# EAGLE board 8or4 spaced (EAGLE 6.4), part 1 of 2
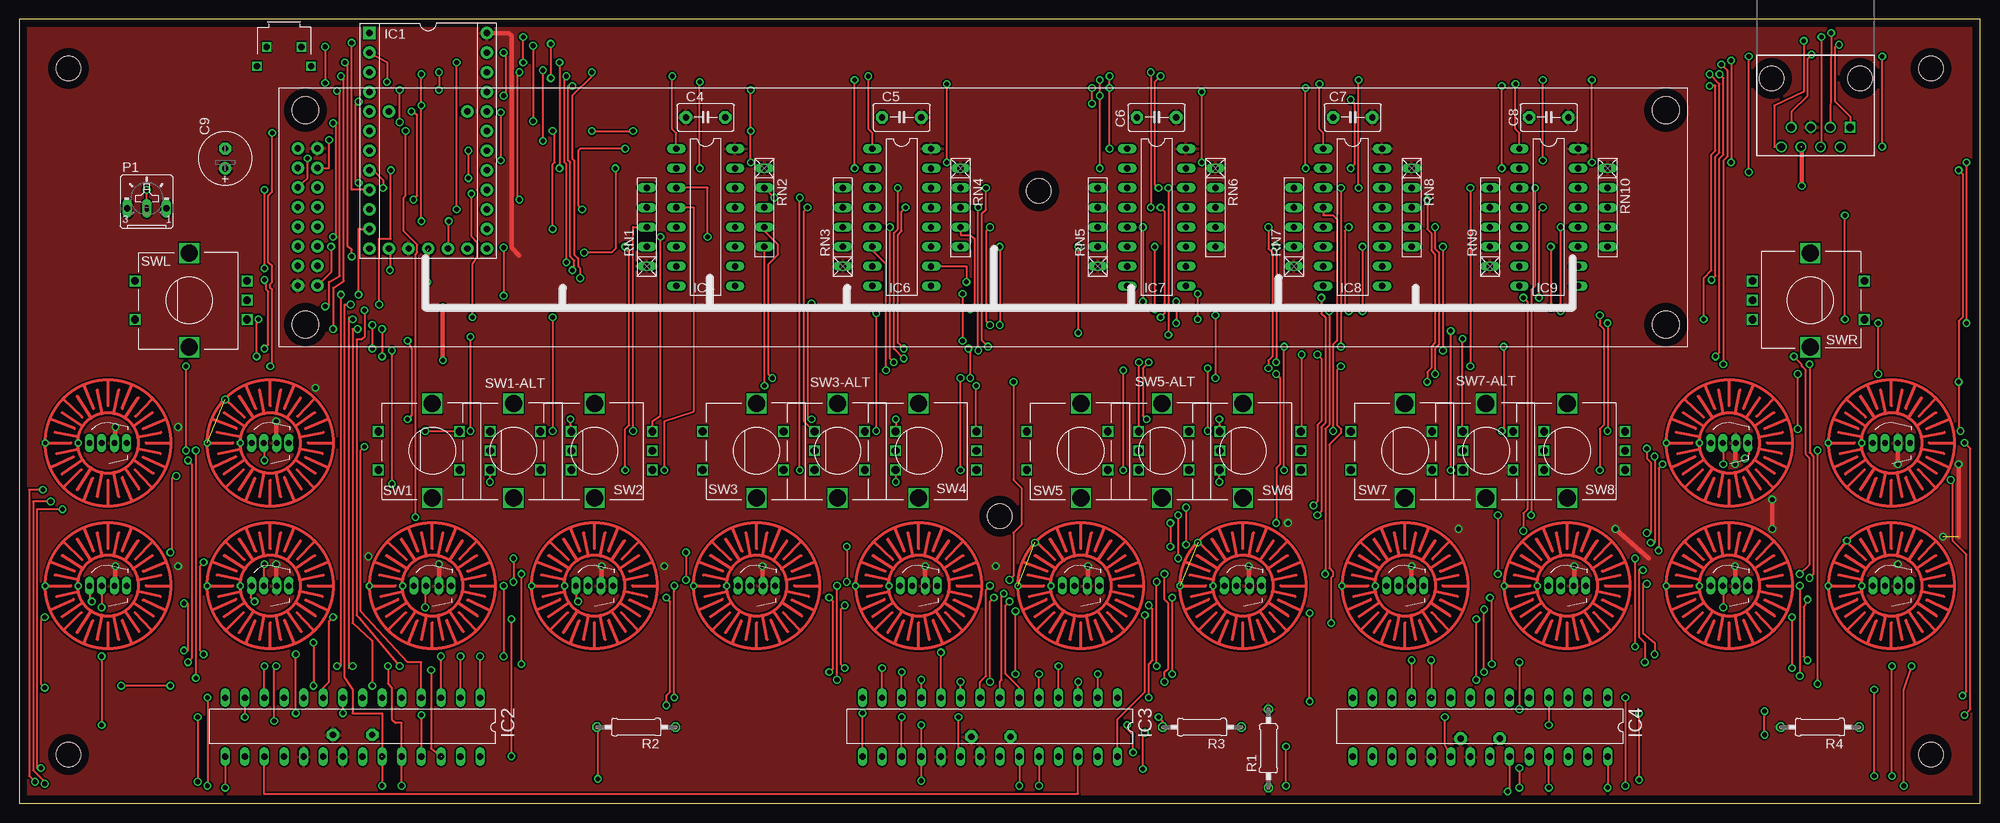
[diagram p0: board, top side]
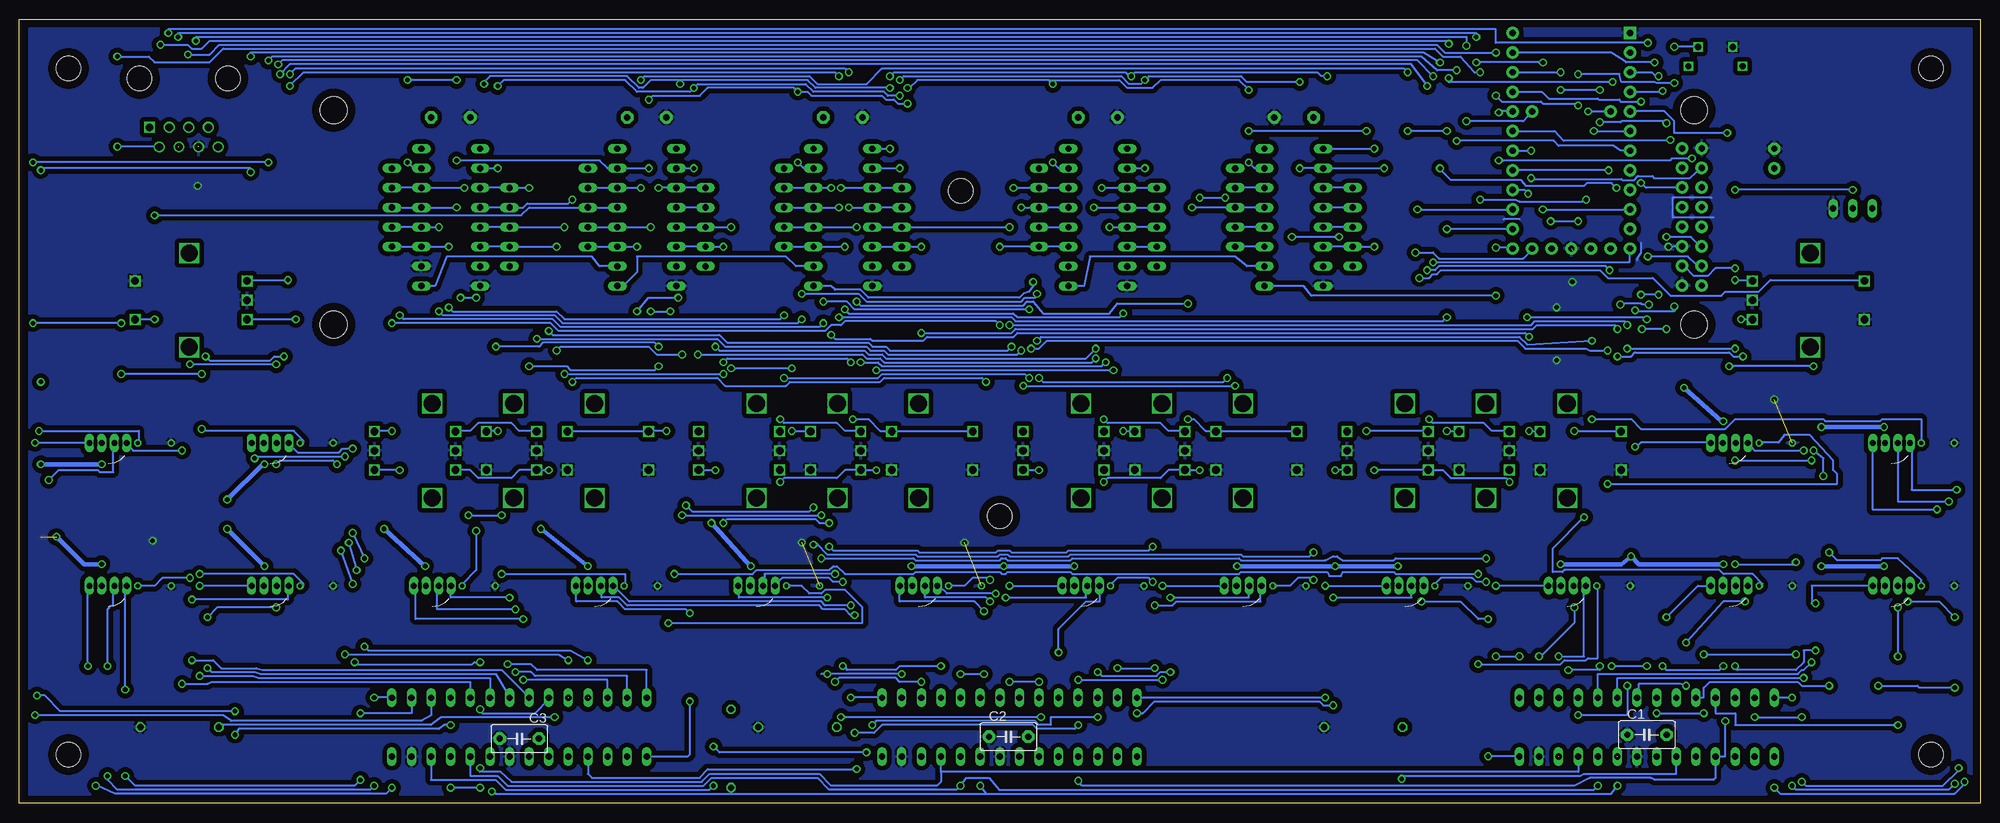
[diagram p1: board, bottom side, seen from below]

Size 254 x 101.6 mm. Coordinates in mm from the lower left corner, seen from the top.
Outline: 0,0 254,0 254,101.6 0,101.6 0,0
Copper layers (1*16): Top 0.035mm / dielectric 1.5mm / Bottom 0.035mm
Design rules "default *": minimum track width 10mil, minimum drill 8mil, track to track 8mil, track to pad 8mil, pad to pad 8mil, via to via 8mil, smd to smd 8mil, copper to edge 40mil, drill to drill 8mil, minimum pad ring 8mil, minimum via ring 8mil, stop-mask expansion 4mil, vias tented up to drill 0mil, thermal gap 10mil
Holes 3.2 mm at 6.35,95.25 6.35,6.35 247.65,6.35 247.65,95.25 132.08,79.38 127,37.21

## Footprints (pad centres in the part's own frame; a part is rotated, then mirrored left to right if it is on the bottom)
C5B3.5 = drill 0.813 pad 1.6 octagon: 1 -2.54,0; 2 2.54,0
E2,5-7 = drill 0.813 pad 1.6: + -1.27,0 | drill 0.813 pad 1.6 octagon: - 1.27,0
LED-RGB-THRU = drill 0.762 pad 0.889 long: 1 2.413,0; 2 0.826,0; 3 -0.826,0; 4 -2.413,0
RJ45-8 = drill 1 square: 1 -4.445,6.35 | drill 1: 2 -3.175,8.89; 3 -1.905,6.35; 4 -0.635,8.89; 5 0.635,6.35; 6 1.905,8.89; 7 3.175,6.35; 8 4.445,8.89 | hole 3.2: -5.715,0; 5.715,0
TEENSY = drill 0.813 pad 1.6: 5V2 13.97,-2.54; +5V -13.97,7.62; B0 -11.43,-7.62; B1 -8.89,-7.62; B2 -6.35,-7.62; B3 -3.81,-7.62; B4 8.89,7.62; B5 6.35,7.62; B6 3.81,7.62; B7 -1.27,-7.62; C6 11.43,-7.62; C7 13.97,-7.62; D0 1.27,-7.62; D1 3.81,-7.62; D2 6.35,-7.62; D3 8.89,-7.62; D4 13.97,5.08; D5 13.97,-5.08; D6 13.97,7.62; D7 11.43,7.62; E6 -3.81,-5.08; F0 -11.43,7.62; F1 -8.89,7.62; F4 -6.35,7.62; F5 -3.81,7.62; F6 -1.27,7.62; F7 1.27,7.62; GRND1 13.97,0; REF -3.81,5.08; RST 13.97,2.54 | drill 0.813 pad 1.6 square: GND -13.97,-7.62
DIP28 = drill 0.813 long: 1 -15.24,-3.81; 2 -12.7,-3.81; 3 -10.16,-3.81; 4 -7.62,-3.81; 5 -5.08,-3.81; 6 -2.54,-3.81; 7 0,-3.81; 8 2.54,-3.81; 9 5.08,-3.81; 10 7.62,-3.81; 11 10.16,-3.81; 12 12.7,-3.81; 13 15.24,-3.81; 14 17.78,-3.81; 15 17.78,3.81; 16 15.24,3.81; 17 12.7,3.81; 18 10.16,3.81; 19 7.62,3.81; 20 5.08,3.81; 21 2.54,3.81; 22 0,3.81; 23 -2.54,3.81; 24 -5.08,3.81; 25 -7.62,3.81; 26 -10.16,3.81; 27 -12.7,3.81; 28 -15.24,3.81
DIL16 = drill 0.813 long: 1 -8.89,-3.81; 2 -6.35,-3.81; 3 -3.81,-3.81; 4 -1.27,-3.81; 5 1.27,-3.81; 6 3.81,-3.81; 7 6.35,-3.81; 8 8.89,-3.81; 9 8.89,3.81; 10 6.35,3.81; 11 3.81,3.81; 12 1.27,3.81; 13 -1.27,3.81; 14 -3.81,3.81; 15 -6.35,3.81; 16 -8.89,3.81
B25U = drill 0.813 long: A 2.54,-0.889; E -2.54,-0.889; S 0,-0.889
0207/10 = drill 0.813 octagon: 1 -5.08,0; 2 5.08,0
RN-5 = drill 0.813 long: 1 -5.08,0; 2 -2.54,0; 3 0,0; 4 2.54,0; 5 5.08,0
ALPS_EC12E_SW = drill 1 square: A -2.5,-7.5; B 2.5,-7.5; C 0,-7.5; D -2.5,7; E 2.5,7 | drill 2.2 square: GND1 -6.1,0; GND2 6.1,0
BMP = drill 0.5 pad 0.813 octagon: 1 -8.159,0; 2 -3.858,0
B3F-3100 = drill 0.8 square: N/C -3.5,2.52; N/C2 3.5,2.52; P1 -2.25,0.02; P2 2.25,0.02
LCD1602 = drill 0.813 pad 1.6: 1 5.04,7.92; 2 2.5,7.92; 3 5.04,10.46; 4 2.5,10.46; 5 5.04,13; 6 2.5,13; 7 5.04,15.54; 8 2.5,15.54; 9 5.04,18.08; 10 2.5,18.08; 11 5.04,20.62; 12 2.5,20.62; 13 5.04,23.16; 14 2.5,23.16; 15 5.04,25.7; 16 2.5,25.7 | hole 3.5: 3.5,2.86; 3.5,30.64; 179.713,30.64; 179.713,2.86

## Placement (x,y rotation side)
C1  .1uF  [C5B3.5]  43.18,8.89 0 bottom
C2  .1uF  [C5B3.5]  125.86,8.64 0 bottom
C3  .1uF  [C5B3.5]  189.23,8.38 0 bottom
C4  .1uF  [C5B3.5]  88.9,88.9 0 top
C5  .1uF  [C5B3.5]  114.3,88.9 0 top
C6  .1uF  [C5B3.5]  147.32,88.9 0 top
C7  .1uF  [C5B3.5]  172.72,88.9 0 top
C8  .1uF  [C5B3.5]  198.12,88.9 0 top
C9  100uF  [E2,5-7]  26.67,83.57 90 top
D1  LED-RGB-CA-THRUDIFFUSE  [LED-RGB-THRU]  53.5,28.2 0 top
D2  LED-RGB-CA-THRUDIFFUSE  [LED-RGB-THRU]  74.5,28.2 0 top
D3  LED-RGB-CA-THRUDIFFUSE  [LED-RGB-THRU]  95.5,28.2 0 top
D4  LED-RGB-CA-THRUDIFFUSE  [LED-RGB-THRU]  116.5,28.2 0 top
D5  LED-RGB-CA-THRUDIFFUSE  [LED-RGB-THRU]  137.5,28.2 0 top
D6  LED-RGB-CA-THRUDIFFUSE  [LED-RGB-THRU]  158.5,28.2 0 top
D7  LED-RGB-CA-THRUDIFFUSE  [LED-RGB-THRU]  179.5,28.2 0 top
D8  LED-RGB-CA-THRUDIFFUSE  [LED-RGB-THRU]  200.5,28.2 0 top
DL1  LED-RGB-CA-THRUDIFFUSE  [LED-RGB-THRU]  11.5,46.7 0 top
DL2  LED-RGB-CA-THRUDIFFUSE  [LED-RGB-THRU]  32.5,46.7 0 top
DL3  LED-RGB-CA-THRUDIFFUSE  [LED-RGB-THRU]  11.5,28.2 0 top
DL4  LED-RGB-CA-THRUDIFFUSE  [LED-RGB-THRU]  32.5,28.2 0 top
DR1  LED-RGB-CA-THRUDIFFUSE  [LED-RGB-THRU]  221.5,46.7 0 top
DR2  LED-RGB-CA-THRUDIFFUSE  [LED-RGB-THRU]  242.5,46.7 0 top
DR3  LED-RGB-CA-THRUDIFFUSE  [LED-RGB-THRU]  221.5,28.2 0 top
DR4  LED-RGB-CA-THRUDIFFUSE  [LED-RGB-THRU]  242.5,28.2 0 top
EXPANSION  RJ45-8PTH  [RJ45-8]  232.69,93.95 180 top
IC1  TEENSY  [TEENSY]  52.96,85.85 270 top
IC2  LEDPWM1  [DIP28]  44.45,9.88 180 top
IC3  LEDPWM2  [DIP28]  127,9.88 180 top
IC4  LEDPWM3  [DIP28]  190.5,9.88 180 top
IC5  74HC165-PN  [DIL16]  88.9,75.95 270 top
IC6  74HC165-PN  [DIL16]  114.3,75.95 270 top
IC7  74HC165-PN  [DIL16]  147.32,75.95 270 top
IC8  74HC165-PN  [DIL16]  172.72,75.95 270 top
IC9  74HC165-PN  [DIL16]  198.12,75.95 270 top
P1  10k  [B25U]  16.51,77.98 0 top
R1  10k  [0207/10]  161.8,7.11 90 top
R2  2k  [0207/10]  79.91,9.88 180 top
R3  2k  [0207/10]  153.2,9.88 180 top
R4  2k  [0207/10]  233.24,9.88 180 top
RN1  10k  [RN-5]  81.28,74.68 90 top
RN2  10k  [RN-5]  96.52,77.22 270 top
RN3  10k  [RN-5]  106.68,74.68 90 top
RN4  10k  [RN-5]  121.92,77.22 270 top
RN5  10k  [RN-5]  139.7,74.68 90 top
RN6  10k  [RN-5]  154.94,77.22 270 top
RN7  10k  [RN-5]  165.1,74.68 90 top
RN8  10k  [RN-5]  180.34,77.22 270 top
RN9  10k  [RN-5]  190.5,74.68 90 top
RN10  10k  [RN-5]  205.74,77.22 270 top
SW1  EC12E_SW  [ALPS_EC12E_SW]  53.5,45.7 90 top
SW1-ALT  EC12E_SW  [ALPS_EC12E_SW]  64,45.7 90 top
SW2  EC12E_SW  [ALPS_EC12E_SW]  74.5,45.7 90 top
SW3  EC12E_SW  [ALPS_EC12E_SW]  95.5,45.7 90 top
SW3-ALT  EC12E_SW  [ALPS_EC12E_SW]  106,45.7 90 top
SW4  EC12E_SW  [ALPS_EC12E_SW]  116.5,45.7 90 top
SW5  EC12E_SW  [ALPS_EC12E_SW]  137.5,45.7 90 top
SW5-ALT  EC12E_SW  [ALPS_EC12E_SW]  148,45.7 90 top
SW6  EC12E_SW  [ALPS_EC12E_SW]  158.5,45.7 90 top
SW7  EC12E_SW  [ALPS_EC12E_SW]  179.5,45.7 90 top
SW7-ALT  EC12E_SW  [ALPS_EC12E_SW]  190,45.7 90 top
SW8  EC12E_SW  [ALPS_EC12E_SW]  200.5,45.7 90 top
SWCH1  [BMP]  53.5,28.2 0 top
SWCH2  [BMP]  74.5,28.2 0 top
SWCH3  [BMP]  95.5,28.2 0 top
SWCH4  [BMP]  116.5,28.2 0 top
SWCH5  [BMP]  137.5,28.2 0 top
SWCH6  [BMP]  158.5,28.2 0 top
SWCH7  [BMP]  179.5,28.2 0 top
SWCH8  [BMP]  200.5,28.2 0 top
SWL  EC12E_SW  [ALPS_EC12E_SW]  22,65.2 90 top
SWL1  [BMP]  11.5,46.7 0 top
SWL2  [BMP]  32.5,46.7 0 top
SWL3  [BMP]  11.5,28.2 0 top
SWL4  [BMP]  32.5,28.2 0 top
SWR  EC12E_SW  [ALPS_EC12E_SW]  232,65.2 270 top
SWR1  [BMP]  221.5,46.7 0 top
SWR2  [BMP]  242.5,46.7 0 top
SWR3  [BMP]  221.5,28.2 0 top
SWR4  [BMP]  242.5,28.2 0 top
U$1  RA-TACT  [B3F-3100]  34.29,98.04 180 top
X1  HD44780LCD-1602  [LCD1602]  33.57,59.18 0 top

## Library data of the parts
C1-C8 = capacitor-wima
C9 = rcl
D1-D8 DL1-DL4 DR1-DR4 = SparkFun-LED; PROD_ID: DIO-10632
EXPANSION = SparkFun
IC1 = teensy
IC2-IC4 = tcl5940
IC5-IC9 = 74xx-us; PWR: 1
P1 = pot
R1-R4 = resistor
RN1-RN10 = resistor-net; OC_FARNELL: unknown; OC_NEWARK: unknown
SW1 SW1-ALT SW2 SW3 SW3-ALT SW4 SW5 SW5-ALT SW6 SW7 SW7-ALT SW8 SWL SWR = switch-alps; MPN: EC12E2424407; OC_FARNELL: 1520813; OC_NEWARK: 74M1068
SWCH1-SWCH8 SWL1-SWL4 SWR1-SWR4 = livid
U$1 = omron
X1 = adafruit

## Nets
+5V: C1.2 C2.2 C3.2 C4.1 C5.2 C6.2 C7.2 C8.2 C9.+ D1.2 D2.2 D3.2 D4.2 D5.2 D6.2 D7.2 D8.2 DL1.2 DL2.2 DL3.2 DL4.2 DR1.2 DR2.2 DR3.2 DR4.2 EXPANSION.5 IC1.5V2 IC1.+5V IC2.19 IC2.21 IC3.19 IC3.21 IC4.19 IC4.21 IC5.16 IC6.16 IC7.16 IC8.16 IC9.16 P1.E R1.2 RN1.1 RN2.1 RN3.1 RN4.1 RN5.1 RN6.1 RN7.1 RN8.1 RN9.1 RN10.1 X1.2 X1.15
AREF: EXPANSION.8 IC1.REF
BLANK: IC1.B6 IC2.23 IC3.23 IC4.23 R1.1
CLKENABLE: IC1.D7 IC5.15 IC6.15 IC7.15 IC8.15 IC9.15
ENC1A: IC5.6 RN1.2 SW1-ALT.A SW1.A
ENC1B: IC5.5 RN1.3 SW1-ALT.B SW1.B
ENC1SW: IC7.14 RN6.2 SW1-ALT.E SW1.E
ENC2A: IC5.4 RN1.4 SW2.A
ENC2B: IC5.3 RN1.5 SW2.B
ENC2SW: IC7.13 RN6.3 SW2.E
ENC3A: IC5.14 RN2.2 SW3-ALT.A SW3.A
ENC3B: IC5.13 RN2.3 SW3-ALT.B SW3.B
ENC3SW: IC7.12 RN6.4 SW3-ALT.E SW3.E
ENC4A: IC5.12 RN2.4 SW4.A
ENC4B: IC5.11 RN2.5 SW4.B
ENC4SW: IC7.11 RN6.5 SW4.E
ENC5A: IC6.6 RN3.2 SW5-ALT.A SW5.A
ENC5B: IC6.5 RN3.3 SW5-ALT.B SW5.B
ENC5SW: IC8.6 RN7.2 SW5-ALT.E SW5.E
ENC6A: IC6.4 RN3.4 SW6.A
ENC6B: IC6.3 RN3.5 SW6.B
ENC6SW: IC8.5 RN7.3 SW6.E
ENC7A: IC6.14 RN4.2 SW7-ALT.A SW7.A
ENC7B: IC6.13 RN4.3 SW7-ALT.B SW7.B
ENC7SW: IC8.4 RN7.4 SW7-ALT.E SW7.E
ENC8A: IC6.12 RN4.4 SW8.A
ENC8B: IC6.11 RN4.5 SW8.B
ENC8SW: IC8.3 RN7.5 SW8.E
ENCLA: IC7.6 RN5.2 SWL.A
ENCLB: IC7.5 RN5.3 SWL.B
ENCLSW: IC8.14 RN8.2 SWL.E
ENCRA: IC7.4 RN5.4 SWR.A
ENCRB: IC7.3 RN5.5 SWR.B
ENCRSW: IC8.13 RN8.3 SWR.E
EXPIO-1: EXPANSION.1 IC1.B0
EXPIO-2: EXPANSION.2 IC1.E6
EXPIO-3-RX: EXPANSION.3 IC1.D2
EXPIO-4-TX: EXPANSION.4 IC1.D3
GND: C1.1 C2.1 C3.1 C4.2 C5.1 C6.1 C7.1 C8.1 C9.- EXPANSION.6 IC1.GND IC1.GRND1 IC2.22 IC2.27 IC3.22 IC3.27 IC4.22 IC4.27 IC5.8 IC6.8 IC7.8 IC8.8 IC9.8 IC9.10 P1.A R2.1 R3.1 R4.1 SW1-ALT.C SW1-ALT.D SW1.C SW1.D SW2.C SW2.D SW3-ALT.C SW3-ALT.D SW3.C SW3.D SW4.C SW4.D SW5-ALT.C SW5-ALT.D SW5.C SW5.D SW6.C SW6.D SW7-ALT.C SW7-ALT.D SW7.C SW7.D SW8.C SW8.D SWCH1.1 SWCH2.1 SWCH3.1 SWCH4.1 SWCH5.1 SWCH6.1 SWCH7.1 SWCH8.1 SWL1.1 SWL2.1 SWL3.1 SWL4.1 SWL.C SWL.D SWR1.1 SWR2.1 SWR3.1 SWR4.1 SWR.C SWR.D U$1.P2 X1.1 X1.5 X1.16
GSCLK: IC1.C6 IC2.18 IC3.18 IC4.18
IC2-R2: IC2.20 R2.2
IC6-5: IC5.10 IC6.9
IC7-6: IC6.10 IC7.9
IC8-7: IC7.10 IC8.9
IC9-8: IC8.10 IC9.9
L1B: D1.4 IC2.3
L1G: D1.3 IC2.2
L1R: D1.1 IC2.1
L2B: D2.4 IC2.28
L2G: D2.3 IC3.15
L2R: D2.1 IC3.14
L3B: D3.4 IC3.13
L3G: D3.3 IC3.12
L3R: D3.1 IC3.11
L4B: D4.4 IC3.10
L4G: D4.3 IC3.9
L4R: D4.1 IC3.8
L5B: D5.4 IC3.7
L5G: D5.3 IC3.6
L5R: D5.1 IC3.5
L6B: D6.4 IC3.4
L6G: D6.3 IC3.3
L6R: D6.1 IC3.2
L7B: D7.4 IC3.1
L7G: D7.3 IC3.28
L7R: D7.1 IC4.15
L8B: D8.4 IC4.14
L8G: D8.3 IC4.13
L8R: D8.1 IC4.12
LCD-CONTRAST: P1.S X1.3
LCD-DB4: IC1.F4 X1.11
LCD-DB5: IC1.F5 X1.12
LCD-DB6: IC1.F6 X1.13
LCD-DB7: IC1.F7 X1.14
LCD-E: IC1.F1 X1.6
LCD-RS: IC1.F0 X1.4
LL1B: DL1.4 IC2.15
LL1G: DL1.3 IC2.14
LL1R: DL1.1 IC2.13
LL2B: DL2.4 IC2.6
LL2G: DL2.3 IC2.5
LL2R: DL2.1 IC2.4
LL3B: DL3.4 IC2.10
LL3G: DL3.3 IC2.11
LL3R: DL3.1 IC2.12
LL4B: DL4.4 IC2.7
LL4G: DL4.3 IC2.8
LL4R: DL4.1 IC2.9
LR1B: DR1.4 IC4.11
LR1G: DR1.3 IC4.10
LR1R: DR1.1 IC4.9
LR2B: DR2.4 IC4.5
LR2G: DR2.3 IC4.4
LR2R: DR2.1 IC4.3
LR3B: DR3.4 IC4.8
LR3G: DR3.3 IC4.7
LR3R: DR3.1 IC4.6
LR4B: DR4.4 IC4.2
LR4G: DR4.3 IC4.1
LR4R: DR4.1 IC4.28
N$10: IC3.20 R3.2
PLOAD: IC1.B4 IC5.1 IC6.1 IC7.1 IC8.1 IC9.1
R4TOIC4: IC4.20 R4.2
RST: EXPANSION.7 IC1.RST U$1.P1
SCLK: IC1.B1 IC2.25 IC3.25 IC4.25
SHIFT-CLK: IC1.D4 IC5.2 IC6.2 IC7.2 IC8.2 IC9.2
SHIFT-DATA: IC1.D6 IC5.9
SIN: IC1.B2 IC2.26
SWCH1: IC8.12 RN8.4 SWCH1.2
SWCH2: IC8.11 RN8.5 SWCH2.2
SWCH3: IC9.6 RN9.2 SWCH3.2
SWCH4: IC9.5 RN9.3 SWCH4.2
SWCH5: IC9.4 RN9.4 SWCH5.2
SWCH6: IC9.3 RN9.5 SWCH6.2
SWCH7: IC9.14 RN10.2 SWCH7.2
SWCH8: IC9.13 RN10.3 SWCH8.2
SWL1: IC9.12 RN10.4 SWL1.2
SWL2: IC9.11 RN10.5 SWL2.2
SWL3: IC1.B3 SWL3.2
SWL4: IC1.B7 SWL4.2
SWR1: IC1.D0 SWR1.2
SWR2: IC1.D1 SWR2.2
SWR3: IC1.D5 SWR3.2
SWR4: IC1.C7 SWR4.2
TLC1-2: IC2.17 IC3.26
TLC2-3: IC3.17 IC4.26
XLAT: IC1.B5 IC2.24 IC3.24 IC4.24